# Altium PCB AD9959.PcbDoc
Units mm, origin at the board's own origin, x right, y up, seen from the top; angles counter-clockwise.
Board outline 80 x 60 mm, 2 copper layers (Top Layer, Bottom Layer); 106 components, 73 nets, 362 pads, 130 vias.
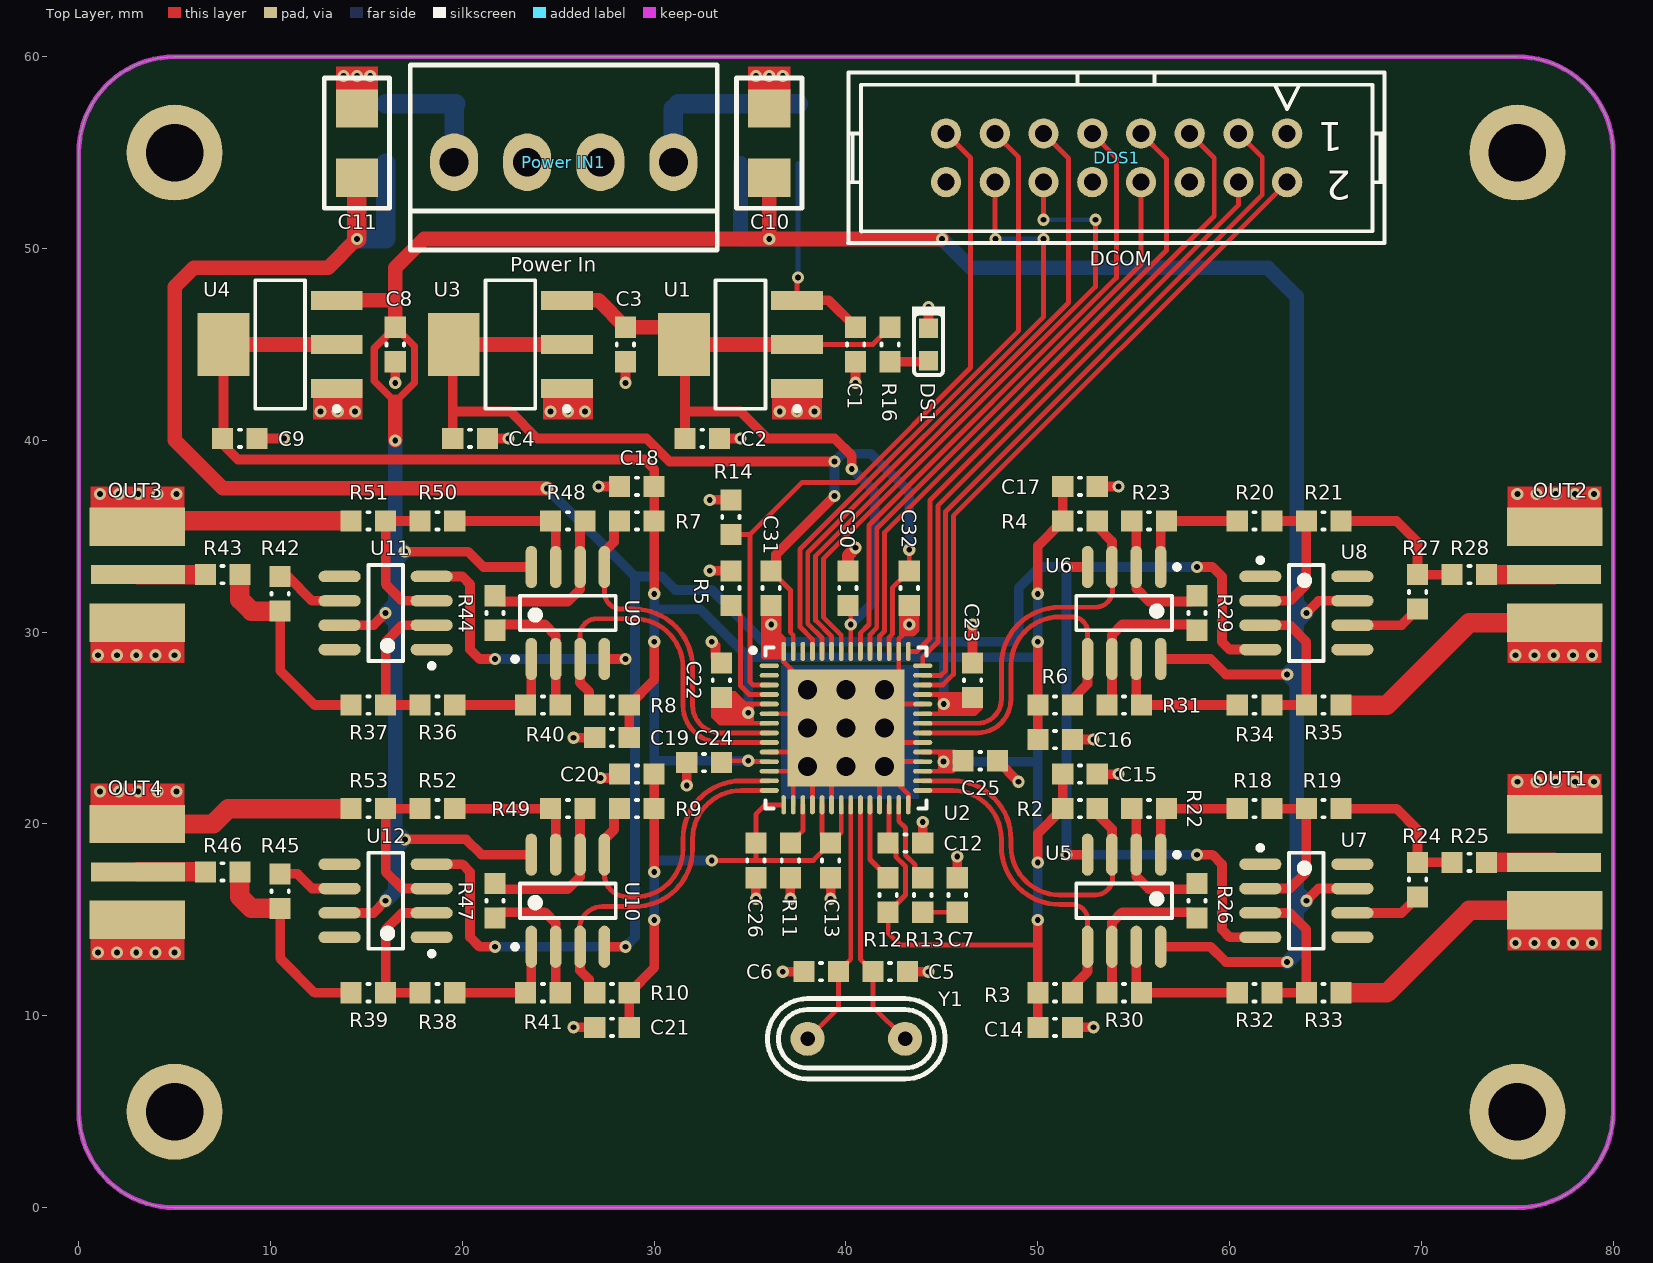
[diagram p0: Top Layer view]
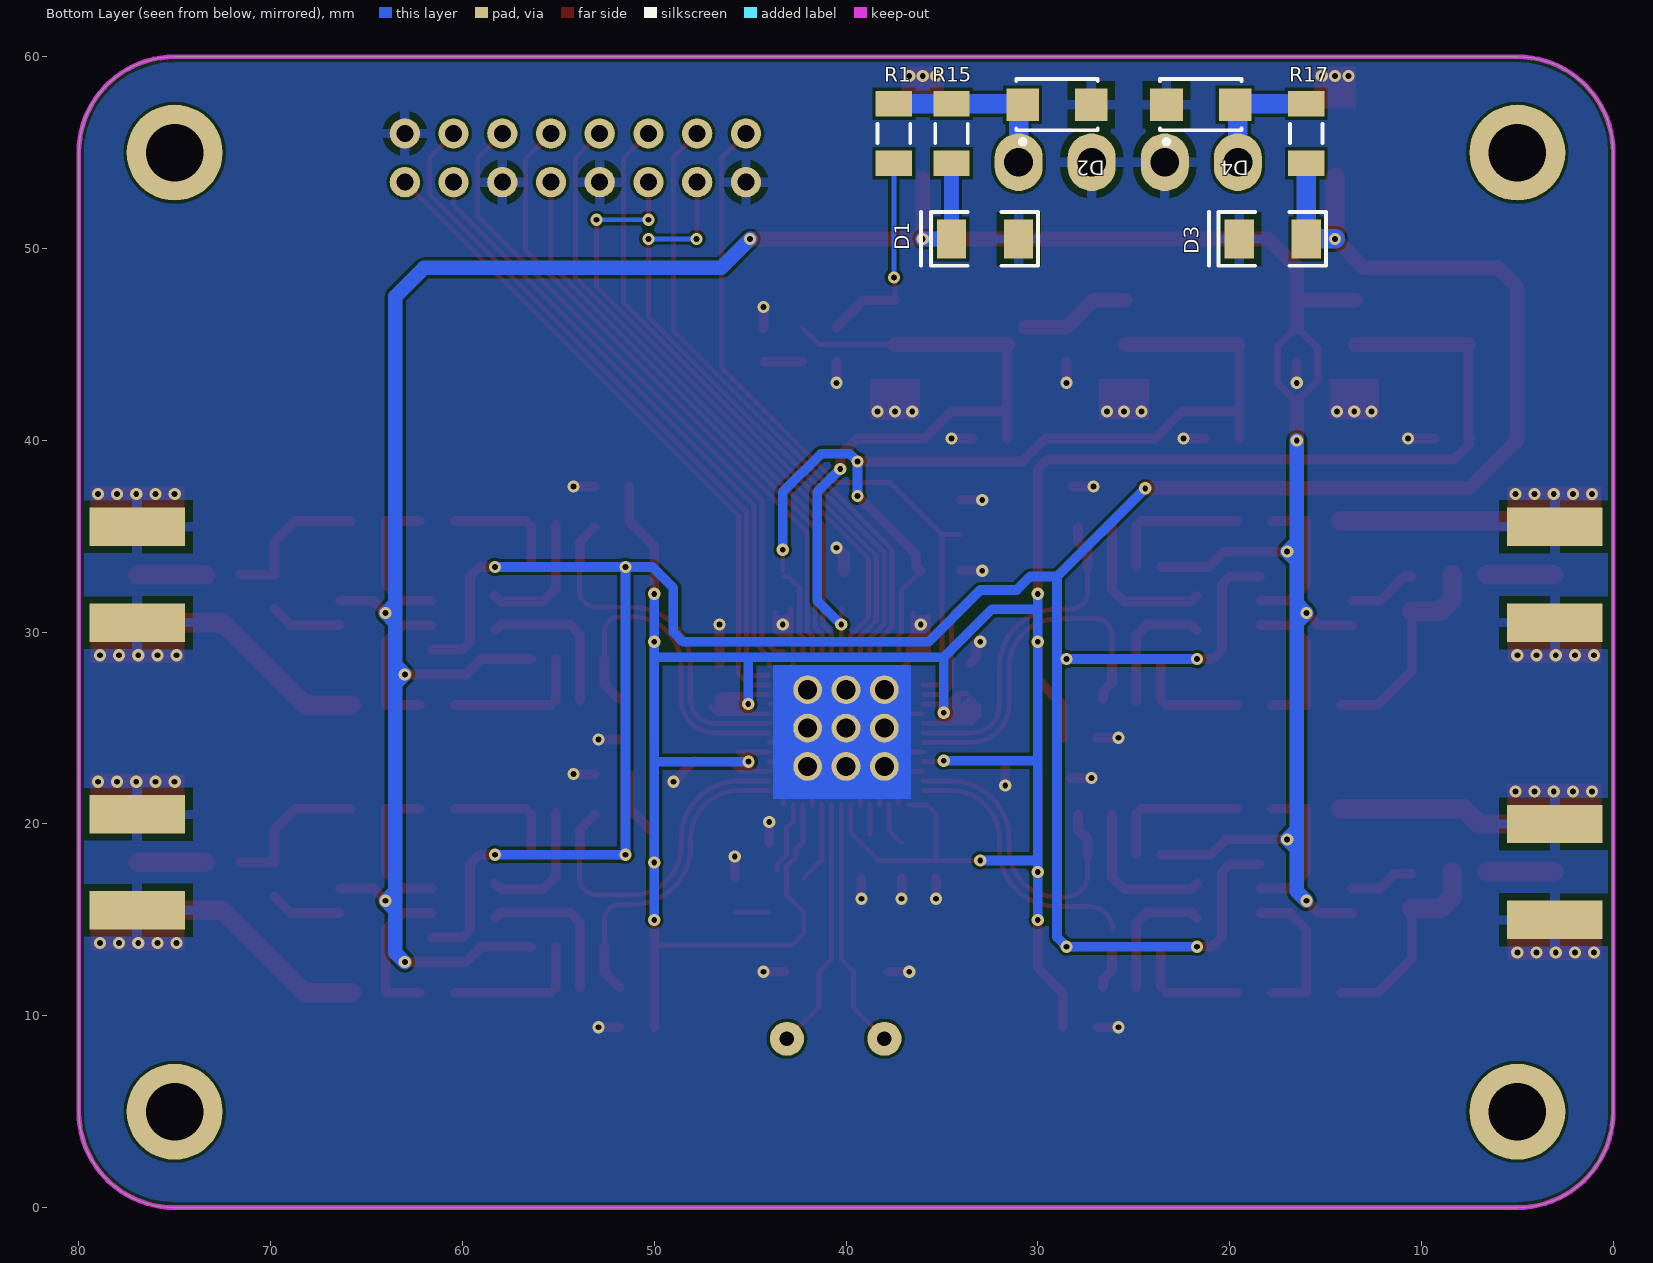
[diagram p1: Bottom Layer view, seen from below]

## Layer stack, top to bottom
Top Solder: solder mask 0.0102, Solder Resist, Dk 3.5
Top Layer: signal copper 0.0356
Dielectric 1: dielectric 0.32, FR-4, Dk 4.8
Bottom Layer: signal copper 0.0356
Bottom Solder: solder mask 0.0102, Solder Resist, Dk 3.5

## Board outline
0,5 ccw(c5,5) 5,0 75,0 ccw(c75,5) 80,5 80,55 ccw(c75,55) 75,60 5,60 ccw(c5,55) 0,55

## Design rules (kind name [scope] priority, off if disabled: settings)
Clearance [All] p1: gap=0.152
HoleSize [All] p1: absolutevalues=TRUE maxlimit=2539.975 minlimit=0.305 maxpercent=80.000 minpercent=20.000
PolygonConnect PolygonConnect_1 [iSVIA] p1: connectstyle=Direct reliefconductorwidth=0.254 reliefentries=4 polygonreliefangle="90 Angle" airgapwidth=0.254
PolygonConnect [All] p2: connectstyle=Relief reliefconductorwidth=0.508 reliefentries=4 polygonreliefangle="90 Angle" airgapwidth=0.381
RoutingVias [All] p1: holewidth=0.305 width=0.635 viastyle="Through Hole" minholewidth=0.305 minwidth=0.635 maxholewidth=711.2 maxwidth=1270
SilkToSilkClearance [All] p1: silktosilkclearance=0.076
SilkToSolderMaskClearance [IsPad] p1: minsilkscreentomaskgap=0.076 clearancetoexposedcopper=TRUE
SolderMaskExpansion [All] p1: expansion=0.102
Width [All] p1: maxlimit=254 minlimit=0.152 preferedwidth=0.254
27 further rules are at their usual default settings.

## Classes and differential pairs
component class AD9959: C1 C2 C3 C4 C5 C6 C7 C8 C9 C10 C11 C12 C13 C14 C15 C16 C17 C18 C19 C20 C21 C22 C23 C24 C25 C26 C30 C31 C32 C35 D1 D2 D3 D4 DDS1 DS1 "Power IN1" R1 R2 R3 R4 R5 R6 R7 R8 R9 R10 R11 R12 R13 R14 R15 R16 R17 U1 U2 U3 U4 Y1
component class AD9959_OUTPUT: OUT1 OUT2 OUT3 OUT4 R18 R19 R20 R21 R22 R23 R24 R25 R26 R27 R28 R29 R30 R31 R32 R33 R34 R35 R36 R37 R38 R39 R40 R41 R42 R43 R44 R45 R46 R47 R48 R49 R50 R51 R52 R53 U5 U6 U7 U8 U9 U10 U11 U12

## Components (designator, comment, footprint, x,y, rotation, side; value= is the part's Value field where it differs from the comment)
C1 "100nF" CAPC0603(1608)55_M 40.5,45 r90 top
C2 "100nF" CAPC0603(1608)55_M 32.5,40.1 r180 top
C3 "100nF" CAPC0603(1608)55_M 28.5,45 r90 top
C4 "100nF" CAPC0603(1608)55_M 20.4,40.1 r180 top
C5 "39pF" CAPC0603(1608)55_M 42.3,12.3 r180 top
C6 "39pF" CAPC0603(1608)55_M 38.7,12.3 r0 top
C7 "680pF" CAPC0603(1608)55_M 45.8,16.3 r90 top
C8 "100nF" CAPC0603(1608)55_M 16.5,45 r90 top
C9 "100nF" CAPC0603(1608)55_M 8.4,40.1 r180 top
C10 "100uF" CAPC3225 36,55.5 r270 top
C11 "100uF" CAPC3225 14.5,55.5 r270 top
C12 "100nF" CAPC0603(1608)55_M 43.1,19 r180 top
C13 "100nF" CAPC0603(1608)55_M 39.2,18.1 r90 top
C14 "100nF" CAPC0603(1608)55_M 50.9,9.4 r180 top
C15 "100nF" CAPC0603(1608)55_M 52.2,22.6 r180 top
C16 "100nF" CAPC0603(1608)55_M 50.9,24.4 r180 top
C17 "100nF" CAPC0603(1608)55_M 52.2,37.6 r180 top
C18 "100nF" CAPC0603(1608)55_M 29.1,37.6 r0 top
C19 "100nF" CAPC0603(1608)55_M 27.8,24.5 r0 top
C20 "100nF" CAPC0603(1608)55_M 29.1,22.6 r0 top
C21 "100nF" CAPC0603(1608)55_M 27.8,9.4 r0 top
C22 "100nF" CAPC0603(1608)55_M 33.5,27.5 r270 top
C23 "100nF" CAPC0603(1608)55_M 46.6,27.5 r270 top
C24 "100nF" CAPC0603(1608)55_M 32.6,23.2 r0 top
C25 "100nF" CAPC0603(1608)55_M 47,23.3 r180 top
C26 "100nF" CAPC0603(1608)55_M 35.3,18.1 r90 top
C30 "100nF" CAPC0603(1608)55_M 40.1,32.3 r270 top
C31 "100nF" CAPC0603(1608)55_M 36.1,32.3 r90 top
C32 "100nF" CAPC0603(1608)55_M 43.3,32.3 r90 top
D1 "5.6V" LL34 34.5,50.5 r90 bottom
D2 "P6KE6.8A" DO-214AC 29,57.5 r0 bottom
D3 "5.6V" LL34 19.5,50.5 r90 bottom
D4 "P6KE6.8A" DO-214AC 21.5,57.5 r0 bottom
DDS1 "Header 8X2" HEADER8X2 63,56 r180 top
DS1 "LED-BLUE" 0603LED_BLUE_V 44.3,45 r270 top
OUT1 "SMA" SMA-V 79.5,18 r180 top
OUT2 "SMA" SMA-V 79.5,33 r180 top
OUT3 "SMA" SMA-V 0.5,33 r0 top
OUT4 "SMA" SMA-V 0.5,17.5 r0 top
"Power IN1" "Header 4" 3.96-4 31,54.5 r180 top
R1 "600R@100MHz" RESC1206(3216)_M 37.5,56 r270 bottom
R2 "49R9" RESC0603(1608)_M 52.2,20.8 r180 top
R3 "49R9" RESC0603(1608)_M 50.9,11.2 r180 top
R4 "49R9" RESC0603(1608)_M 52.2,35.8 r180 top
R5 "1K" RESC0603(1608)_M 34,32.3 r270 top
R6 "49R9" RESC0603(1608)_M 50.9,26.2 r180 top
R7 "49R9" RESC0603(1608)_M 29.1,35.8 r0 top
R8 "49R9" RESC0603(1608)_M 27.8,26.2 r0 top
R9 "49R9" RESC0603(1608)_M 29.1,20.8 r0 top
R10 "49R9" RESC0603(1608)_M 27.8,11.2 r0 top
R11 "2K 0.5%" RESC0603(1608)_M 37.1,18.1 r270 top
R12 "1K" RESC0603(1608)_M 42.2,16.3 r90 top
R13 "680" RESC0603(1608)_M 44,16.3 r270 top
R14 "1K" RESC0603(1608)_M 34,36 r270 top
R15 "600R@100MHz" RESC1206(3216)_M 34.5,56 r270 bottom
R16 "1K" RESC0603(1608)_M 42.3,45 r90 top
R17 "600R@100MHz" RESC1206(3216)_M 16,56 r270 bottom
R18 "330R" RESC0603(1608)_M 61.3,20.8 r0 top
R19 "680R" RESC0603(1608)_M 64.9,20.8 r0 top
R20 "330R" RESC0603(1608)_M 61.3,35.8 r0 top
R21 "680R" RESC0603(1608)_M 64.9,35.8 r0 top
R22 "100R" RESC0603(1608)_M 55.8,20.8 r0 top
R23 "100R" RESC0603(1608)_M 55.8,35.8 r0 top
R24 "10R" RESC0603(1608)_M 69.8,17.1 r90 top
R25 "49R9" RESC0603(1608)_M 72.5,18 r0 top
R26 "200R" RESC0603(1608)_M 58.3,16 r90 top
R27 "10R" RESC0603(1608)_M 69.8,32.1 r90 top
R28 "49R9" RESC0603(1608)_M 72.5,33 r0 top
R29 "200R" RESC0603(1608)_M 58.3,31 r90 top
R30 "100R" RESC0603(1608)_M 54.5,11.2 r180 top
R31 "100R" RESC0603(1608)_M 54.5,26.2 r180 top
R32 "330R" RESC0603(1608)_M 61.3,11.2 r0 top
R33 "680R" RESC0603(1608)_M 64.9,11.2 r0 top
R34 "330R" RESC0603(1608)_M 61.3,26.2 r0 top
R35 "680R" RESC0603(1608)_M 64.9,26.2 r0 top
R36 "330R" RESC0603(1608)_M 18.7,26.2 r180 top
R37 "680R" RESC0603(1608)_M 15.1,26.2 r180 top
R38 "330R" RESC0603(1608)_M 18.7,11.2 r180 top
R39 "680R" RESC0603(1608)_M 15.1,11.2 r180 top
R40 "100R" RESC0603(1608)_M 24.2,26.2 r180 top
R41 "100R" RESC0603(1608)_M 24.2,11.2 r180 top
R42 "10R" RESC0603(1608)_M 10.5,32 r270 top
R43 "49R9" RESC0603(1608)_M 7.5,33 r180 top
R44 "200R" RESC0603(1608)_M 21.7,31 r270 top
R45 "10R" RESC0603(1608)_M 10.5,16.5 r270 top
R46 "49R9" RESC0603(1608)_M 7.5,17.5 r180 top
R47 "200R" RESC0603(1608)_M 21.7,16 r270 top
R48 "100R" RESC0603(1608)_M 25.5,35.8 r0 top
R49 "100R" RESC0603(1608)_M 25.5,20.8 r0 top
R50 "330R" RESC0603(1608)_M 18.7,35.8 r180 top
R51 "680R" RESC0603(1608)_M 15.1,35.8 r180 top
R52 "330R" RESC0603(1608)_M 18.7,20.8 r180 top
R53 "680R" RESC0603(1608)_M 15.1,20.8 r180 top
U1 "AMS1117-3.3" SOT-223_M 34.5,45 r180 top
U2 "AD9959" QFN56 40,25 r0 top
U3 "AMS1117-1.8" SOT-223_M 22.5,45 r180 top
U4 "AMS1117-1.8" SOT-223_M 10.5,45 r180 top
U5 "OP2" SOIC8 54.5,16 r270 top
U6 "OP2" SOIC8 54.5,31 r270 top
U7 "THS3201" SOIC8 64,16 r0 top
U8 "THS3201" SOIC8 64,31 r0 top
U9 "OP2" SOIC8 25.5,31 r90 top
U10 "OP2" SOIC8 25.5,16 r90 top
U11 "THS3201" SOIC8 16,31 r180 top
U12 "THS3201" SOIC8 16,16 r180 top
Y1 "25MHz" HC-49S 38,8.8 r0 top

## Footprints (in the part's own frame and the unit in brackets; to place one, negate y for a bottom-side part, rotate by r counter-clockwise, add the part's x,y. Pads: shape width x height; smd on the part's side, far side on the other; paste and mask are expansions set on the pad)
3.96-4 [mm]
  oval 2.5x3 hole 1.5: 1(0,0) 2(3.81,0) 3(7.62,0) 4(11.43,0)
  silkscreen extent -2.29,-5.08 13.72,4.57, body extent -2.29,-5.08 13.72,4.45, height 10
0603LED_BLUE_V [mm] "SMT LED, 2-Leads, Body 1.6x0.8mm (0603-Size)"
  rect 1x1 smd paste+0 mask+0: 1(0.85,0) 2(-0.85,0)
  silkscreen extent -1.97,-0.85 1.6,0.85, body extent -0.92,-0.53 1.09,0.53, height 1.1
CAPC0603(1608)55_M [mm] "Chip Capacitor, Body 1.6x0.8mm, Height 0.55mm, IPC Low Density"
  rect 1.1x1.1 smd: 1(-0.9,0) 2(0.9,0)
  silkscreen extent -0.05,-0.45 0.05,0.45, body extent -0.87,-0.47 0.88,0.48, height 0.55
CAPC3225 [mm] "SMT Capacitor, 2 Leads, Body 3.5x2.8mm"
  rect 2x2.2 smd: 1(-1.8,0) 2(1.8,0)
  silkscreen extent -3.4,-1.7 3.4,1.7, body extent -1.6,-1.3 1.6,1.3, height 2.5
DO-214AC [mm] "SMA, 2-Leads, Body 4.245x2.665mm, Height 2.29mm"
  rect 1.7x1.68 smd: 1(-1.79,0) 2(1.79,0)
  silkscreen extent -2.12,-1.33 2.12,2.06, body extent -2.57,-1.33 2.57,1.33, height 2.29
HC-49S [mil]
  round 70 hole 30: 1(0,0) 2(200,0)
  silkscreen extent -82,-82 282,82, body extent -82,-82 282,82, height 118
HEADER8X2 [mil]
  round 62 hole 35: 1(0,0) 2(0,100) 3(100,0) 4(100,100) 5(200,0) 6(200,100) 7(300,0) 8(300,100) 9(400,0) 10(400,100) 11(500,0) 12(500,100) 13(600,0) 14(600,100) 15(700,0) 16(700,100)
  silkscreen extent -200,-125 902,225
LL34 [mil]
  rect 80x60 smd: 1(0,-137.8) 2(0,0)
  silkscreen extent -55,-178 55,62
QFN56 [mm] "QFN, 56-Leads, Body 8x8mm, Pitch 0.5mm, Thermal Pad 6.1x6.1mm, IPC Low Density"
  oval 1x0.25 smd: 1(-4,3.25) 2(-4,2.75) 3(-4,2.25) 4(-4,1.75) 5(-4,1.25) 6(-4,0.75) 7(-4,0.25) 8(-4,-0.25) 9(-4,-0.75) 10(-4,-1.25) 11(-4,-1.75) 12(-4,-2.25) 13(-4,-2.75) 14(-4,-3.25) 29(4,-3.25) 30(4,-2.75) 31(4,-2.25) 32(4,-1.75) 33(4,-1.25) 34(4,-0.75) 35(4,-0.25) 36(4,0.25) 37(4,0.75) 38(4,1.25) 39(4,1.75) 40(4,2.25) 41(4,2.75) 42(4,3.25)
  oval 0.25x1 smd: 15(-3.25,-4) 16(-2.75,-4) 17(-2.25,-4) 18(-1.75,-4) 19(-1.25,-4) 20(-0.75,-4) 21(-0.25,-4) 22(0.25,-4) 23(0.75,-4) 24(1.25,-4) 25(1.75,-4) 26(2.25,-4) 27(2.75,-4) 28(3.25,-4) 43(3.25,4) 44(2.75,4) 45(2.25,4) 46(1.75,4) 47(1.25,4) 48(0.75,4) 49(0.25,4) 50(-0.25,4) 51(-0.75,4) 52(-1.25,4) 53(-1.75,4) 54(-2.25,4) 55(-2.75,4) 56(-3.25,4)
  rect 6.1x6.1 smd: 57(0,0)
  silkscreen extent -4.97,-4.2 4.2,4.2, body extent -4.05,-4.05 4.05,4.05, height 1
RESC0603(1608)_M [mm] "Chip Resistor, Body 1.6x0.8mm, IPC Low Density"
  rect 1.1x1.1 smd: 1(-0.9,0) 2(0.9,0)
  silkscreen extent -0.05,-0.45 0.05,0.45, body extent -0.85,-0.47 0.85,0.47, height 0.6
RESC1206(3216)_M [mm] "Chip Resistor, Body 3.2x1.6mm, IPC Low Density"
  rect 1.35x1.9 smd: 1(-1.55,0) 2(1.55,0)
  silkscreen extent -0.5,-0.85 0.5,0.85, body extent -1.67,-0.87 1.67,0.87, height 0.75
SMA-V [mm]
  rect 4.9x1 smd: 1(2.6,0)
  rect 5x2 smd: 2(2.55,2.5) 2(2.55,-2.5)
  rect 5x2 smd far side: 2(2.55,2.5) 2(2.55,-2.5)
SOIC8 [mm] "SOIC, 8-Leads, Body 4.9x3.9mm, Pitch 1.27mm, IPC Medium Density"
  oval 2.2x0.6 smd: 1(-2.4,1.905) 2(-2.4,0.635) 3(-2.4,-0.635) 4(-2.4,-1.905) 5(2.4,-1.905) 6(2.4,-0.635) 7(2.4,0.635) 8(2.4,1.905)
  silkscreen extent -2.52,-2.5 0.9,2.88, body extent -2,-2.5 2,2.5, height 1.75
SOT-223_M [mm] "SOT223, 4-Leads, Body 6.5x3.5mm, Pitch 2.3mm, Lead Span 7mm, IPC Low Density"
  rect 2.7x1 smd: 1(-2.95,2.3) 2(-2.95,0) 3(-2.95,-2.3)
  rect 2.7x3.3 smd: 2(2.95,0)
  silkscreen extent -3.08,-3.35 1.3,3.47, body extent -1.85,-3.35 1.85,3.35, height 1.8

## Part data
C1 C2 C3 C4 C5 C6 C7 C8 C9 C10 C11 C12 C13 C14 C15 C16 C17 C18 C19 C20 C21 C22 C23 C24 C25 C26 C30 C31 C32: library part CAP
D1 D3: library part "D Zener", "Zener Diode"
D2 D4: library part Diode
DDS1: "Header, 8-Pin, Dual row"
"Power IN1": "Header, 4-Pin"
R1 R15 R17: library part "Ferrite Bead", "Ferrite Bead"
R2 R3 R4 R5 R6 R7 R8 R9 R10 R11 R12 R13 R14 R16 R18 R19 R20 R21 R22 R23 R24 R25 R26 R27 R28 R29 R30 R31 R32 R33 R34 R35 R36 R37 R38 R39 R40 R41 R42 R43 R44 R45 R46 R47 R48 R49 R50 R51 R52 R53: library part RES
U1 U3 U4: library part AMS1117
Y1: library part XTAL, "Crystal Oscillator"

## Free pads (board coordinates)
  round 5 hole 3: 0(5,55) 1(5,5) 2(75,5) 3(75,55)
  round 1.5 hole 1: 4(38,23) 4(38,25) 4(38,27) 4(40,23) 4(40,25) 4(40,27) 4(42,23) 4(42,25) 4(42,27)

## Via types
v1: diameter 0.635, hole 0.305, Top Layer to Bottom Layer, tented both sides, 130 vias

## Nets (pads, with @x,y where several pads share a name; then routed paths per layer and width w, separated by ;. In a path a pad name is that pad's centre, name@x,y a point inside that pad or via, vN(x,y) a via of type N, cw(c..) or ccw(c..) an arc to the next point about the centre after c; other vN are vias at no path point)
1.8VA: C9.2 C12.2 C13.2 C14.2 C15.2 C16.2 C17.2 C18.2 C19.2 C20.2 C21.2 C22.2 C23.2 C24.2 C25.2 C26.2 R2.2 R3.2 R4.2 R6.2 R7.2 R8.2 R9.2 R10.2 R12.1 U2.5 U2.7 U2.11 U2.15 U2.19 U2.21 U2.26 U2.31 U2.33 U2.37 U2.39 U4.2 | length 202.9
  Top Layer w0.254: v1(33,18.1) 38.3,18.1 C13.2 39.75,19.55 U2.21 ; C22.2@33.1,26.2 33.1,25.6 33.45,25.25 U2.7 ; C22.2 34.3,25.8 v1(34.9,25.8) ; C22.2@33.7,26.8 34.2,26.8 34.75,26.25 U2.5 ; C24.2@33.9,23.2 34,23.3 v1(34.9,23.3) 34.95,23.25 U2.11 ; 35.3,18.1 C26.2 35.3,20.5 35.8,21 U2.15 ; C13.2@38.75,19.45 U2.19 ; C12.2 42.3,19 42.6,18.7 42.6,18.3 43.1,17.8 43.1,16.3 R12.1 42.2,14.3 42.8,13.7 50,13.7 ; C12.2@42.25,19.05 U2.26 ; U2.31 45.55,22.75 C25.2@46.05,23.25 ; U2.33 C25.2@45.65,23.75 ; U2.37 46.7,25.75 47.025,26.075 C23.2@47.025,26.125 ; U2.39 C23.2@46.45,26.75 ; v1(45.075,23.25) C25.2@46.05,23.25 ; C25.2 C25.2@46.05,23.25
  Top Layer w0.508: C9.2@7.5,39.8 8.3,39 29.5,39 30,38.5 C18.2 R7.2 v1(30,32) ; C9.2 7.55,40.1 U4.2@7.55,45 ; C21.2 R10.2 30,12.5 v1(30,15) ; C19.2 R8.2 30,27.5 v1(30,29.5) ; v1(30,17.5) R9.2 C20.2 ; C14.2 R3.2 50,13.7 v1(50,15) ; v1(50,18) 50,19.5 R2.2 C15.2 ; C16.2 R6.2 v1(50,29.5) ; v1(50,32) 50,34.5 R4.2 C17.2
  Top Layer w0.762: U4.2@7.55,45 U4.2@13.45,45
  Bottom Layer w0.508: v1(30,15) v1(30,17.5) 30,18.1 ; v1(30,32) 30,31.2 ; v1(33,18.1) 30,18.1 ; v1(34.9,23.3) 30,23.3 ; v1(34.9,25.8) 34.9,28.7 ; v1(45.075,23.25) 49.95,23.25 ; v1(45.1,26.25) 45.1,28.7 ; v1(50,15) v1(50,18) 50,28.7 ; v1(50,32) v1(50,29.5) 50,28.7 ; 30,18.1 30,23.3 ; 30,23.3 v1(30,29.5) 30,31.2 ; 30,31.2 32.4,31.2 34.9,28.7 ; 34.9,28.7 45.1,28.7 ; 45.1,28.7 50,28.7
1.8VD: C4.2 C31.2 C32.2 U2.45 U2.55 U3.2 | length 57
  Top Layer w0.254: C31.2 37.1,32.2 37.1,30 37.25,29.85 U2.55 ; U2.45 42.25,29.725 42.419,29.894 42.419,32.319 43,32.9 C32.2@43.3,32.9 ; C32.2 v1(43.3,34.3)
  Top Layer w0.508: C4.2 19.5,41.5 ; U3.2@19.5,45 19.5,41.5 ; C31.2 36.35,33.45 36.35,34.05 v1(39.4,37.1) ; v1(39.4,38.9) 30.8,38.9 29.6,40.1 23.9,40.1 22.5,41.5 19.5,41.5
  Top Layer w0.762: U3.2@19.55,45 U3.2@25.45,45
  Bottom Layer w0.508: v1(39.4,37.1) v1(39.4,38.9) 39.8,39.3 41.3,39.3 43.3,37.3 v1(43.3,34.3)
3.3VD: C2.2 C3.2 C30.2 R16.2 U1.2 U2.49 U3.3 | length 43.5
  Top Layer w0.254: U1.2@37.45,45 41.4,45 R16.2 ; U2.49 v1(40.25,30.4) C30.2@40.25,31.25
  Top Layer w0.508: C2.2 31.6,41.5 ; U1.2@31.6,45 31.6,41.5 ; v1(40.3,38.5) 40.3,39.2 39.4,40.1 35.9,40.1 34.5,41.5 31.6,41.5
  Top Layer w0.762: U3.3 27.1,47.3 C3.2 U1.2@30.65,45.9 ; U1.2@31.55,45 31.6,45 U1.2@37.45,45
  Bottom Layer w0.508: v1(40.25,30.4) 41.5,31.65 41.5,37.3 v1(40.3,38.5)
+5VA: C8.2 C10.2 D1.2 R15.2 U4.3 U5.8 U6.8 U7.7 U8.7 U9.8 U10.8 U11.7 U12.7 | length 181.2
  Top Layer w0.381: 15.4,43.1 15.4,44.8 C8.2 17.5,44.9 17.5,43 16.5,42 15.4,43.1
  Top Layer w0.508: U12.7 15.365,15.365 v1(16,16) ; U11.7 15.365,30.365 v1(16,31) ; v1(17,19.2) 20.2,19.2 21,18.4 U10.8 ; v1(17,34.2) 20.3,34.2 21.1,33.4 U9.8 ; U5.8 59,13.6 59.8,12.8 v1(63,12.8) ; U6.8 59,28.6 59.8,27.8 v1(63,27.8) ; v1(64,16) 64.635,16.635 U7.7 ; v1(64,31) 64.635,31.635 U8.7
  Top Layer w0.762: U4.3 16.5,47.3 ; v1(16.5,40) 16.5,42 ; C8.2 16.5,49 18,50.5 v1(36,50.5) ; C10.2 v1(36,50.5) ; v1(45,50.5) v1(36,50.5)
  Bottom Layer w0.762: v1(16,16) 16.5,16.5 16.5,18.7 ; v1(16.5,40) 16.5,34.7 ; R15.2 D1.2 v1(36,50.5) ; v1(45,50.5) 46.5,49 62,49 63.5,47.5 63.5,31.5 ; v1(63,12.8) 63.5,13.3 63.5,15.5 ; 16.5,18.7 16.5,19.7 ; 16.5,18.7 v1(17,19.2) 16.5,19.7 ; 16.5,19.7 16.5,30.5 ; 16.5,30.5 16.5,31.5 ; 16.5,30.5 v1(16,31) 16.5,31.5 ; 16.5,31.5 16.5,33.7 ; 16.5,33.7 16.5,34.7 ; 16.5,33.7 v1(17,34.2) 16.5,34.7 ; 63.5,15.5 63.5,16.5 ; 63.5,15.5 v1(64,16) 63.5,16.5 ; 63.5,16.5 63.5,27.3 ; 63.5,27.3 63.5,28.3 ; 63.5,27.3 v1(63,27.8) 63.5,28.3 ; 63.5,28.3 63.5,30.5 ; 63.5,30.5 63.5,31.5 ; 63.5,30.5 v1(64,31) 63.5,31.5
-5VA: C11.2 D3.1 R17.2 U5.4 U6.4 U7.4 U8.4 U9.4 U10.4 U11.4 U12.4 | length 175.7
  Top Layer w0.508: U12.4 19.995,17.905 20.4,17.5 20.4,14.1 20.9,13.6 v1(21.7,13.6) ; U11.4 19.995,32.905 20.4,32.5 20.4,29.1 20.9,28.6 v1(21.7,28.6) ; U10.4 v1(28.5,13.6) ; U9.4 v1(28.5,28.6) ; v1(51.5,18.4) U5.4 ; v1(51.5,33.4) U6.4 ; v1(58.3,18.4) 59.1,18.4 59.6,17.9 59.6,14.5 60.005,14.095 U7.4 ; v1(58.3,33.4) 59.1,33.4 59.6,32.9 59.6,29.5 60.005,29.095 U8.4
  Top Layer w0.762: v1(14.5,50.5) 13,49 6,49 5,48 5,40 7.5,37.5 v1(24.4,37.5)
  Top Layer w1.016: v1(14.5,50.5) C11.2
  Bottom Layer w0.508: v1(21.7,13.6) v1(28.5,13.6) 29,14.1 29,28.6 ; v1(21.7,28.6) v1(28.5,28.6) 29,28.6 ; v1@24.5,37.4 29,32.9 ; v1(58.3,18.4) v1(51.5,18.4) v1(51.5,33.4) ; v1(58.3,33.4) v1(51.5,33.4) ; 29,28.6 29,32.9 ; 29,32.9 30.4,32.9 31.1,32.2 33,32.2 35.7,29.5 48.5,29.5 49,30 49,32.3 50.1,33.4 v1(51.5,33.4)
  Bottom Layer w1.016: v1(14.5,50.5) D3.1 R17.2
CH0_IOUT: R2.1 U2.30 U5.3 | length 17.6
  Top Layer w0.254: U2.30 45.56,22.25 cw(c45.56,19.21) 48.6,19.21 48.6,18.84 ccw(c51.14,18.84) 51.14,16.3 53,16.3 ccw(c53,17.2) 53.9,17.2 53.9,18.365 ccw(c53.865,18.365) U5.3
  Top Layer w0.508: R2.1@53.1,20.5 53.865,19.735 U5.3
CH0_IOUTN: R3.1 U2.29 U5.5 | length 16.4
  Top Layer w0.254: U2.29 45.56,21.75 cw(c45.56,19.21) 48.1,19.21 48.1,18.84 ccw(c51.14,18.84) 51.14,15.8 51.8,15.8 cw(c51.8,15.005) 52.595,15.005 U5.5
  Top Layer w0.508: R3.1@51.8,11.5 52.595,12.295 U5.5
CH1_IOUT: R4.1 U2.36 U6.3 | length 18.3
  Top Layer w0.254: U2.36 46.85,25.25 ccw(c46.85,26.5) 48.1,26.5 48.1,28.26 cw(c51.14,28.26) 51.14,31.3 53,31.3 ccw(c53,32.2) 53.9,32.2 53.9,33.365 ccw(c53.865,33.365) U6.3
  Top Layer w0.508: R4.1@53.1,35.5 53.865,34.735 U6.3
CH1_IOUTN: R6.1 U2.35 U6.5 | length 17.1
  Top Layer w0.254: U2.35 46.85,24.75 ccw(c46.85,26.5) 48.6,26.5 48.6,28.26 cw(c51.14,28.26) 51.14,30.8 51.8,30.8 cw(c51.8,30) 52.6,30 U6.5@52.6,28.6
  Top Layer w0.508: R6.1@51.8,26.5 52.595,27.295 U6.5
CH2_IOUT: R7.1 U2.8 U9.5 | length 17.2
  Top Layer w0.254: U9.5@27.4,33.4 27.4,32.1 ccw(c28.3,32.1) 28.3,31.2 28.96,31.2 cw(c28.96,28.16) 32,28.16 32,26.2 ccw(c33.45,26.2) 33.45,24.75 U2.8
  Top Layer w0.508: U9.5 27.405,34.205 27.9,34.7 R7.1@27.9,35.5
CH2_IOUTN: R8.1 U2.9 U9.3 | length 18.4
  Top Layer w0.254: U9.3 26.135,29.835 cw(c27,29.835) 27,30.7 28.96,30.7 cw(c28.96,28.16) 31.5,28.16 31.5,26.2 ccw(c33.45,26.2) 33.45,24.25 U2.9
  Top Layer w0.508: U9.3 26.135,27.365 26.6,26.9 R8.1@26.6,26.5
CH3_IOUT: R9.1 U2.13 U10.5 | length 16.3
  Top Layer w0.254: U10.5@27.4,18.4 27.4,17.4 ccw(c28.6,17.4) 28.6,16.2 29,16.2 ccw(c29,18.7) 31.5,18.7 31.5,19.21 cw(c34.54,19.21) 34.54,22.25 U2.13
  Top Layer w0.508: U10.5 27.405,19.205 27.9,19.7 R9.1@27.9,20.5
CH3_IOUTN: R10.1 U2.14 U10.3 | length 16.5
  Top Layer w0.254: U10.3@26.1,14.5 cw(c27.3,14.5) 27.3,15.7 29,15.7 ccw(c29,18.7) 32,18.7 32,19.21 cw(c34.54,19.21) 34.54,21.75 U2.14
  Top Layer w0.508: U10.3 26.135,12.365 26.6,11.9 R10.1@26.6,11.5
CLKSEL: R12.2 U2.24 | length 4.2
  Top Layer w0.254: U2.24 41.25,18.15 R12.2
CS: DDS1.8 U2.47 | length 30.3
  Top Layer w0.254: U2.47 41.25,29.875 41.606,30.232 41.606,35.406 55.38,49.18 DDS1.8
GND: "Power IN1.2" "Power IN1.3" C1.1 C2.1 C3.1 C4.1 C5.1 C6.1 C7.2 C8.1 C9.1 C10.1 C11.1 C12.1 C13.1 C14.1 C15.1 C16.1 C17.1 C18.1 C19.1 C20.1 C21.1 C22.1 C23.1 C24.1 C25.1 C26.1 C30.1 C31.1 C32.1 D1.1 D2.1 D3.2 D4.2 DDS1.1 DDS1.6 DDS1.10 DDS1.16 DS1.2 OUT1.2 OUT2.2 OUT3.2 OUT4.2 pad.4 R5.1 R11.2 R14.1 R33.2 R35.2 R51.2 R53.2 U1.1 U2.6 U2.10 U2.12 U2.16 U2.18 U2.20 U2.25 U2.28 U2.32 U2.34 U2.38 U2.44 U2.56 U2.57 U3.1 U4.1 | length 125.4
  Top Layer w0.254: C31.1@35.7,30.9 35.7,28.7 36.6,28.7 ; U2.12 U2.57@37.75,22.75 ; U2.10 U2.57@38.75,23.75 ; U2.6 U2.57@39.25,25.75 ; 36.5,28.8 36.5,29.9 ; C31.1@36.5,31 36.5,29.9 ; U2.16 U2.57@37.25,22.25 ; U2.18 U2.57@38.25,23.25 ; U2.20 U2.57@39.25,24.25 ; U2.57@40,24.8 U2.57@41.75,23.05 ; U2.57@40,25.2 36.75,28.45 U2.56@36.75,28.7 ; U2.57@40.75,24.25 U2.34 ; U2.57@41.25,26.25 U2.38 ; U2.25 U2.57@41.75,23.05 ; U2.57@42.75,27.75 U2.44 42.75,29.65 43,29.9 43.5,29.9 43.7,30.1 C32.1@43.7,31 ; 42.9,29.8 C32.1@42.9,31.2 ; U2.28 43.25,21.55 U2.57@41.75,23.05 ; U2.32 41.75,23.25 U2.57@41.75,23.05 ; 36.5,29.9 36.6,29.8 ; 36.6,28.7 36.6,29.8 ; 36.6,28.7 U2.56@36.75,28.7 ; 36.6,29.8 36.75,29.65 U2.56 U2.56@36.75,28.7
  Top Layer w0.508: C9.1 v1(10.7,40.1) ; v1(16.5,43) C8.1 ; C4.1 v1(22.4,40.1) ; v1(25.8,9.4) C21.1 ; v1(25.8,24.5) C19.1 ; v1(27.1,37.6) C18.1 ; v1(27.2,22.4) C20.1@28.3,22.4 ; v1(28.5,43) C3.1 ; v1(31.7,22) C24.1 ; v1(32.9,33.2) R5.1 ; v1(32.9,36.9) R14.1 ; v1(33,29.5) 33.2,29.3 33.2,28.7 C22.1 ; C2.1 v1(34.5,40.1) ; v1(35.3,16.1) C26.1 ; v1(36.7,12.3) C6.1 ; v1(37.1,16.1) R11.2 ; v1(39.2,16.1) C13.1 ; v1(40.5,43) C1.1 ; C5.1 v1(44.3,12.3) ; C12.1 v1(44,20.1) ; DS1.2 v1(44.3,46.95) ; C7.2 v1(45.8,18.3) ; C23.1 v1(46.6,30.4) ; C25.1 v1(49,22.2) ; C14.1 v1(52.9,9.4) ; C16.1 v1(52.9,24.4) ; C15.1 v1(54.2,22.6) ; C17.1 v1(54.2,37.6)
  Top Layer w0.635: C30.1 40.1,34 v1(40.5,34.4)
  Top Layer w1.016: OUT3.2@3.35,35.8 R51.2 ; OUT4.2@5.2,20 7,20 7.8,20.8 R53.2 ; R33.2 68.2,11.2 72.5,15.5 OUT1.2@75.4,15.5 ; R35.2 68.2,26.2 72.5,30.5 OUT2.2@75.5,30.5
  other v1: 1,13.3 2,13.3 3,13.3 4,13.3 5,13.3 74.9,13.8 75.9,13.8 76.9,13.8 77.9,13.8 78.9,13.8 1.1,21.7 2.1,21.7 3.1,21.7 4.1,21.7 5.1,21.7 75,22.2 76,22.2 77,22.2 78,22.2 79,22.2 1,28.8 2,28.8 3,28.8 4,28.8 5,28.8 74.9,28.8 75.9,28.8 76.9,28.8 77.9,28.8 78.9,28.8 36.1,30.4 43.3,30.4 1.1,37.2 2.1,37.2 3.1,37.2 4.1,37.2 5.1,37.2 75,37.2 76,37.2 77,37.2 78,37.2 79,37.2 12.6,41.5 13.5,41.5 14.4,41.5 24.6,41.5 25.5,41.5 26.4,41.5 36.55,41.5 37.45,41.5 38.35,41.5 13.8,59 14.5,59 15.2,59 35.3,59 36,59 36.7,59
NetC1_2: C1.2 R1.2 U1.3 | length 10.8
  Top Layer w0.254: U1.3 37.45,48.45 v1(37.5,48.5)
  Top Layer w0.508: U1.3 39.1,47.3 C1.2
  Bottom Layer w0.254: v1(37.5,48.5) R1.2
NetC7_1: C7.1 R13.2 | length 1.8
  Top Layer w0.254: R13.2 C7.1
NetDS1_1: DS1.1 R16.1 | length 2
  Top Layer w0.508: R16.1 DS1.1@44.25,44.1
NetOUT1_1: OUT1.1 R25.2 | length 3.5
  Top Layer w1.016: R25.2 OUT1.1
NetOUT2_1: OUT2.1 R28.2 | length 3.5
  Top Layer w1.016: R28.2 OUT2.1
NetOUT3_1: OUT3.1 R43.2 | length 3.5
  Top Layer w1.016: OUT3.1 R43.2
NetOUT4_1: OUT4.1 R46.2 | length 3.5
  Top Layer w1.016: OUT4.1 R46.2
NetR5_2: R5.2 U2.4 | length 6.1
  Top Layer w0.254: R5.2 34.5,30.9 34.5,27.2 34.95,26.75 U2.4
NetR11_1: R11.1 U2.17 | length 2.3
  Top Layer w0.254: R11.1 37.75,19.65 U2.17
NetR13_1: R13.1 U2.27 | length 3.8
  Top Layer w0.254: U2.27 42.75,20.15 43.1,19.8 43.1,18.375 43.6,17.875 R13.1@43.6,17.6
NetR18_1: R18.1 R22.2 U5.1 | length 5.8
  Top Layer w0.508: U5.1 R22.2@56.405,20.505 ; R22.2 R18.1
NetR18_2: R18.2 R19.1 U7.2 | length 7.9
  Top Layer w0.508: U7.2 63.135,16.635 64,17.5 R19.1 R18.2
NetR19_2: R19.2 R24.2 R25.1 | length 8
  Top Layer w0.508: R19.2 68.7,20.8 69.8,19.7 R24.2 R25.1
NetR20_1: R20.1 R23.2 U6.1 | length 5.8
  Top Layer w0.508: U6.1 R23.2@56.405,35.505 ; R23.2 R20.1
NetR20_2: R20.2 R21.1 U8.2 | length 7.9
  Top Layer w0.508: U8.2 63.135,31.635 64,32.5 R21.1 R20.2
NetR21_2: R21.2 R27.2 R28.1 | length 8
  Top Layer w0.508: R21.2 68.7,35.8 69.8,34.7 R27.2 R28.1
NetR22_1: R22.1 R26.2 U5.2 | length 6.9
  Top Layer w0.508: R22.1@55.135,20.565 U5.2 55.135,17.265 55.8,16.6 58,16.6 R26.2
NetR23_1: R23.1 R29.2 U6.2 | length 6.9
  Top Layer w0.508: R23.1@55.135,35.565 U6.2 55.135,32.265 55.8,31.6 58,31.6 R29.2
NetR24_1: R24.1 U7.6 | length 3.7
  Top Layer w0.508: U7.6 68.965,15.365 R24.1
NetR26_1: R26.1 R30.2 U5.6 | length 8.2
  Top Layer w0.508: R30.2@53.865,11.465 U5.6 53.865,14.865 54.4,15.4 58,15.4 R26.1
NetR27_1: R27.1 U8.6 | length 3.7
  Top Layer w0.508: U8.6 68.965,30.365 R27.1
NetR29_1: R29.1 R31.2 U6.6 | length 8.2
  Top Layer w0.508: R31.2@53.865,26.465 U6.6 53.865,29.865 54.4,30.4 58,30.4 R29.1
NetR30_1: R30.1 R32.1 U5.7 | length 7.1
  Top Layer w0.508: R30.1@55.135,11.465 U5.7 ; R30.1 R32.1
NetR31_1: R31.1 R34.1 U6.7 | length 7.1
  Top Layer w0.508: R31.1@55.135,26.465 U6.7 ; R31.1 R34.1
NetR32_2: R32.2 R33.1 U7.3 | length 7.9
  Top Layer w0.508: U7.3 63.135,15.365 64,14.5 R33.1 R32.2
NetR34_2: R34.2 R35.1 U8.3 | length 7.9
  Top Layer w0.508: U8.3 63.135,30.365 64,29.5 R35.1 R34.2
NetR36_1: R36.1 R40.2 U9.1 | length 5.8
  Top Layer w0.508: R36.1 R40.2 ; R40.2@23.595,26.495 U9.1
NetR36_2: R36.2 R37.1 U11.2 | length 7.9
  Top Layer w0.508: R36.2 R37.1 16,29.5 16.865,30.365 U11.2
NetR37_2: R37.2 R42.2 R43.1 | length 11.2
  Top Layer w0.508: R42.2 10.5,28 12.3,26.2 R37.2
  Top Layer w1.016: R43.1 8.4,31.7 9,31.1 R42.2
NetR38_1: R38.1 R41.2 U10.1 | length 5.8
  Top Layer w0.508: R38.1 R41.2 ; R41.2@23.595,11.495 U10.1
NetR38_2: R38.2 R39.1 U12.2 | length 7.9
  Top Layer w0.508: R38.2 R39.1 16,14.5 16.865,15.365 U12.2
NetR39_2: R39.2 R45.2 R46.1 | length 10.7
  Top Layer w0.508: R45.2 10.5,13 12.3,11.2 R39.2
  Top Layer w1.016: R46.1 8.4,16.2 9,15.6 R45.2
NetR40_1: R40.1 R44.2 U9.2 | length 6.9
  Top Layer w0.508: R44.2 22,30.4 24.3,30.4 24.865,29.835 U9.2 R40.1@24.865,26.435
NetR41_1: R41.1 R47.2 U10.2 | length 6.9
  Top Layer w0.508: R47.2 22,15.4 24.3,15.4 24.865,14.835 U10.2 R41.1@24.865,11.435
NetR42_1: R42.1 U11.6 | length 3.6
  Top Layer w0.508: R42.1 10.9,32.9 12.165,31.635 U11.6
NetR44_1: R44.1 R48.2 U9.6 | length 8.1
  Top Layer w0.508: R44.1 22,31.6 25.5,31.6 26.135,32.235 U9.6 R48.2@26.135,35.535
NetR45_1: R45.1 U12.6 | length 3.4
  Top Layer w0.508: R45.1 11.4,17.4 12.165,16.635 U12.6
NetR47_1: R47.1 R49.2 U10.6 | length 8.1
  Top Layer w0.508: R47.1 22,16.6 25.5,16.6 26.135,17.235 U10.6 R49.2@26.135,20.535
NetR48_1: R48.1 R50.1 U9.7 | length 7.1
  Top Layer w0.508: R50.1 R48.1 ; U9.7 R48.1@24.865,35.535
NetR49_1: R49.1 R52.1 U10.7 | length 7.1
  Top Layer w0.508: R52.1 R49.1 ; U10.7 R49.1@24.865,20.535
NetR50_2: R50.2 R51.1 U11.3 | length 7.9
  Top Layer w0.508: R50.2 R51.1 16,32.5 16.865,31.635 U11.3
NetR52_2: R52.2 R53.1 U12.3 | length 7.9
  Top Layer w0.508: R52.2 R53.1 16,17.5 16.865,16.635 U12.3
P0: DDS1.2 U2.40 | length 34.7
  Top Layer w0.254: U2.40 45.05,27.25 45.6,27.8 45.6,36.06 DDS1.2
P1: DDS1.3 U2.41 | length 36.7
  Top Layer w0.254: U2.41 44.95,27.75 45.194,27.994 45.194,36.294 61.7,52.8 61.7,54.76 DDS1.3
P2: DDS1.4 U2.42 | length 32
  Top Layer w0.254: U2.42 44,28.7 44.787,29.487 44.787,36.587 60.46,52.26 DDS1.4
P3: DDS1.5 U2.43 | length 34.4
  Top Layer w0.254: U2.43 43.7,29 44.381,29.681 44.381,36.881 59.2,51.7 59.2,54.72 DDS1.5
REFCLK: C5.2 U2.23 Y1.2 | length 13.2
  Top Layer w0.254: U2.23 40.75,12.95 C5.2 41.4,10.48 Y1.2
REFCLKN: C6.2 U2.22 Y1.1 | length 13.1
  Top Layer w0.254: Y1.1 39.6,10.4 C6.2 40.25,12.95 U2.22
RESET: DDS1.15 R14.2 U2.3 | length 37.6
  Top Layer w0.254: R14.2 35,35.1 ; U2.3 35.15,27.25 35,27.4 35,35.1 ; DDS1.15 46.5,54.72 46.5,43.799 40.501,37.8 37.7,37.8 35,35.1
SCLK: DDS1.9 U2.48 | length 33.1
  Top Layer w0.254: U2.48 40.75,29.95 41.2,30.4 41.2,35.575 54.1,48.475 54.1,54.74 DDS1.9
SDIO0: DDS1.12 U2.50 | length 33.4
  Top Layer w0.254: U2.50 39.75,29.85 38.819,30.781 38.819,33.819 53,48 v1(53,51.5) ; v1(50.3,51.5) DDS1.12
  Bottom Layer w0.254: v1(50.3,51.5) v1(53,51.5)
SDIO1: DDS1.11 U2.51 | length 33.3
  Top Layer w0.254: U2.51 39.25,29.775 38.413,30.612 38.413,33.988 51.6,47.175 51.6,54.7 DDS1.11
SDIO2: DDS1.14 U2.52 | length 32.4
  Top Layer w0.254: U2.52 38.75,29.701 38.006,30.444 38.006,34.156 50.3,46.449 v1(50.3,50.5) ; DDS1.14 47.76,50.54 v1(47.8,50.5)
  Bottom Layer w0.254: v1(47.8,50.5) v1(50.3,50.5)
SDIO3: DDS1.13 U2.53 | length 32.5
  Top Layer w0.254: U2.53 38.25,29.626 37.6,30.276 37.6,34.324 49,45.724 49,54.76 DDS1.13
UP: DDS1.7 U2.46 | length 33.7
  Top Layer w0.254: U2.46 41.75,29.799 42.013,30.062 42.013,35.213 56.7,49.9 56.7,54.68 DDS1.7
V+: "Power IN1.1" D2.2 R1.1 R15.1 | length 9
  Bottom Layer w1.016: 31,54.5 D2.2@31,57.29 ; D2.2@31.26,57.55 R15.1 R1.1
V-: "Power IN1.4" D4.1 R17.1 | length 6.6
  Bottom Layer w1.016: R17.1 D4.1@19.66,57.55 ; 19.57,54.5 D4.1@19.57,57.46
pads on no net: U2.1 U2.2 U2.54 U7.1 U7.5 U7.8 U8.1 U8.5 U8.8 U11.1 U11.5 U11.8 U12.1 U12.5 U12.8

## Polygon pours and split planes (outlines as drawn)
GND on Bottom Layer "Top Layer-No Net" (solid, remove dead copper, pour order 0): 0,0 80,0 80,60 0,60

## Keep-outs
Keep-Out Layer:
  the board outline again, w0.254

## Other copper
Top Layer:
  rectangle net GND: 13.4,57.3 15.6,59.5
  rectangle net GND: 34.9,57.3 37.1,59.5
  rectangle net GND: 74.5,13.4 79.4,14.6
  region net GND: 79.4,22.6 74.5,22.6 74.5,21.4 79.4,21.4
  rectangle net GND: 74.5,28.4 79.4,29.6
  region net GND: 79.4,37.6 74.5,37.6 74.5,36.4 79.4,36.4
  rectangle net GND: 0.6,28.4 5.5,29.6
  region net GND: 5.5,37.6 0.6,37.6 0.6,36.4 5.5,36.4
  region net GND: 5.5,22.1 0.6,22.1 0.6,20.9 5.5,20.9
  rectangle net GND: 0.6,12.9 5.5,14.1
  rectangle net GND: 43,30 43.6,30.9
  rectangle net GND: 36.15,41.1 38.75,43.2
  rectangle net GND: 24.2,41.1 26.8,43.2
  rectangle net GND: 12.2,41.1 14.8,43.2
  rectangle net 1.8VA: 34.4,26.2 34.6,26.5
  rectangle net 1.8VA: 34,26.2 34.4,26.7
  rectangle net 1.8VA: 33.2,25.4 33.6,26.5
  rectangle net 1.8VA: 33.45,25.25 35.2,26.25
  rectangle net 1.8VA: 45.75,25.85 46.85,26.75
  rectangle net 1.8VA: 44.8,25.75 45.75,26.75
  rectangle net 1.8VA: 44.8,22.75 45.55,23.75
  rectangle net GND: 35.7,28.7 36.6,30.9
Bottom Layer:
  rectangle net GND: 36.6,21.3 43.8,28.286

## Silkscreen, mask and mechanical layers (free items; w line width, h text height)
Top Overlay:
  text "DCOM" at 52.7,49.1 h0.76
  text "Power In" at 22.5,48.8 h0.76
Bottom Solder:
  rectangle: 17.1,28 21.1,29.2
  rectangle: 17.1,29.2 28.4,32.7
  rectangle: 17.1,20 17.7,28
  rectangle: 17.7,14.2 28.4,28
  rectangle: 17.1,13 21.1,18.4
  rectangle: 17.1,0.4 30.5,13
  rectangle: 62.2,0.4 62.8,12.1
  rectangle: 49.5,13.6 50.8,14.4
  rectangle: 49.5,0.4 62.2,13.6
  rectangle: 50.6,13.6 58.9,17.8
  rectangle: 58.9,13.6 62.8,18.9
  rectangle: 62.3,28.7 62.8,32.9
  rectangle: 62.3,18.9 62.8,27
  rectangle: 52,18.9 62.3,32.9
  rectangle: 34.8,0.4 46.3,5.7
  rectangle: 30.5,0.4 34.8,12
  rectangle: 46.3,0.4 49.5,12
  rectangle: 30.5,12 49.5,14.5
  rectangle: 33.6,17.3 35.6,18.8
  rectangle: 30.5,14.5 35.4,17.5
  rectangle: 44.6,14.5 49.5,22.6
  rectangle: 30.5,18.7 35.4,22.7
  rectangle: 30.5,23.8 34.4,28.2
  rectangle: 34.4,23.9 35.4,25.3
  rectangle: 44.6,23.8 45.6,25.7
  rectangle: 45.6,23.8 49.5,28.2
  rectangle: 35.4,14.5 44.6,28.2
  lines w2.032: 34.7,12.1 38,12.1 ; 34.8,5.5 38,5.5 ; 43.08,5.5 ccw(c43.08,8.8) 43.08,12.1 ; 45.9,5.5 38,5.5 ; 46,12.1 38,12.1 ; 38,5.5 cw(c38,8.8) 38,12.1

## Text inside footprints (layer, text, board x,y; h text height)
DDS1: Top Overlay "1" at 65.921,56.584 h1.52 r180; Top Overlay "2" at 66.353,54.07 h1.52 r180